# Altium PCB PCB5.PcbDoc
Units mil, origin at the board's own origin, x right, y up, seen from the top; angles counter-clockwise.
Board outline 5410 x 2710 mil, 2 copper layers (Top Layer, Bottom Layer); 51 components, 36 nets, 130 pads, 9 vias.
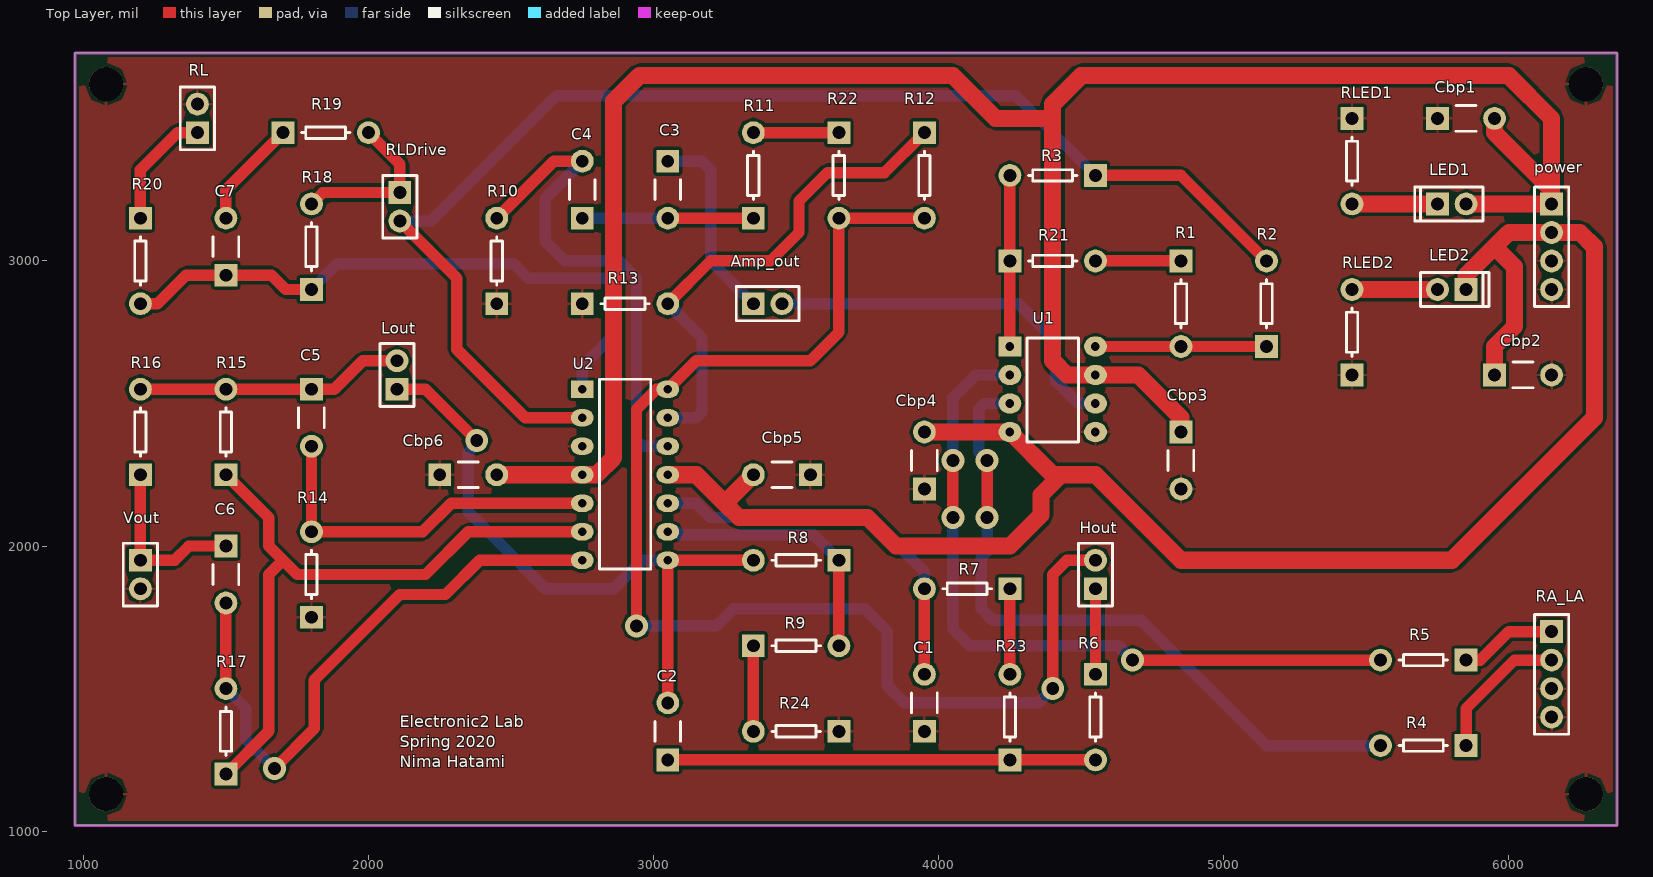
[diagram p0: Top Layer view]
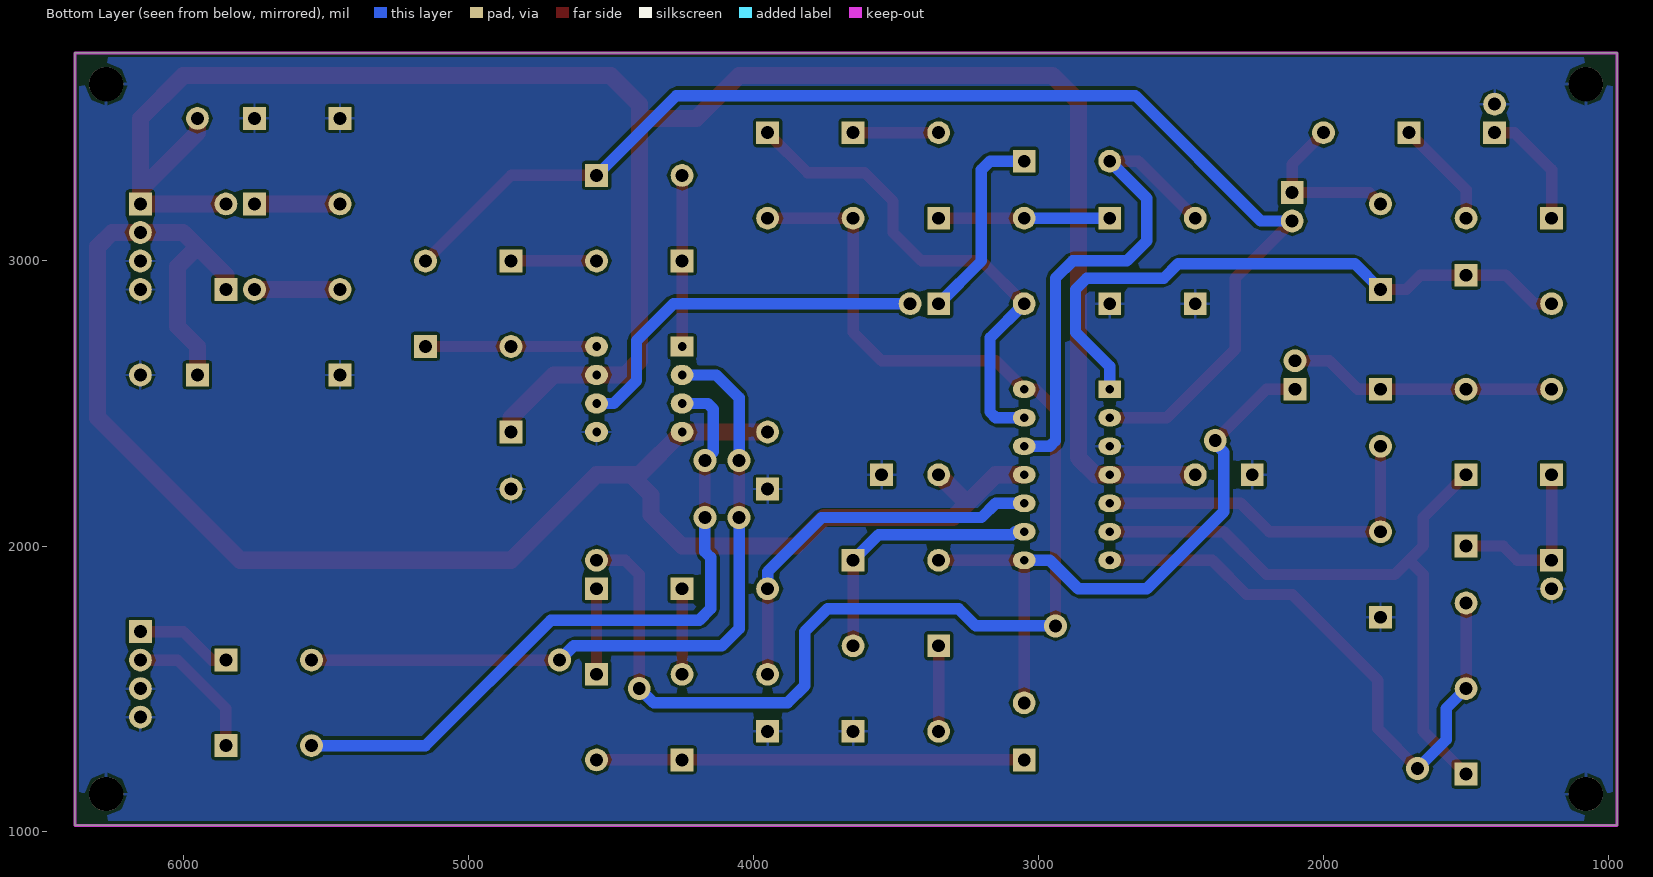
[diagram p1: Bottom Layer view, seen from below]

## Layer stack, top to bottom
Top Solder: solder mask 0.4, Solder Resist, Dk 3.5
Top Layer: signal copper 1.4
Dielectric 1: dielectric 12.6, FR-4, Dk 4.8
Bottom Layer: signal copper 1.4
Bottom Solder: solder mask 0.4, Solder Resist, Dk 3.5

## Board outline
970,1020 970,3730 6380,3730 6380,1020

## Design rules (kind name [scope] priority, off if disabled: settings)
Clearance [All] p1: gap=10 ignorepadtopadclearanceinfootprint=FALSE except(0: Arc-Hole Track-Hole SMDPad-Hole THPad-Hole Via-Hole Fill-Hole Poly-Hole Region-Hole Text-Hole)
HoleSize [All] p1: absolutevalues=TRUE maxlimit=120 minlimit=1 maxpercent=80.000 minpercent=20.000
PolygonConnect [All] p1: connectstyle=Relief reliefconductorwidth=10 reliefentries=4 polygonreliefangle="90 Angle" airgapwidth=10
RoutingVias [All] p1: holewidth=28 width=50 viastyle="Through Hole" minholewidth=28 minwidth=50 maxholewidth=45 maxwidth=80
SolderMaskExpansion [All] p1: expansion=4 istentingtop=FALSE
Width [All] p1: maxlimit=60 minlimit=10 preferedwidth=10
29 further rules are at their usual default settings.

## Components (designator, comment, footprint, x,y, rotation, side; value= is the part's Value field where it differs from the comment)
Amp_out "port" pinheader 3350,2850 r0 top
C1 "Cap" cap 3950,1350 r90 top value=15nF
C2 "Cap" cap 3050,1250 r90 top value=2.2uF
C3 "Cap" cap 3050,3350 r270 top value=2.2uF
C4 "Cap" cap 2750,3150 r90 top value=6.8uF
C5 "Cap" cap 1800,2550 r270 top value=47nF
C6 "Cap" cap 1500,2000 r270 top value=47nF
C7 "Cap" cap 1500,2950 r90 top value=100nF
Cbp1 "Cap" cap 5750,3500 r0 top value=10uF
Cbp2 "Cap" cap 5950,2600 r0 top value=10uF
Cbp3 "Cap" cap 4850,2400 r270 top value=100nF
Cbp4 "Cap" cap 3950,2200 r90 top value=100nF
Cbp5 "Cap" cap 3550,2250 r180 top value=100nF
Cbp6 "Cap" cap 2250,2250 r0 top value=100nF
Hout "port" pinheader 4550,1850 r90 top
LED1 "LED1" LED1 5750,3200 r90 top
LED2 "LED1" LED1 5850,2900 r270 top
Lout "port" pinheader 2100,2550 r90 top
power "pin4" PINHEADER4 6150,3200 r0 top
R1 "Res Semi" res 4850,3000 r270 top value=12k
R2 "Res Semi" res 5150,2700 r90 top value=22k
R3 "Res Semi" res 4550,3300 r180 top value=22k
R4 "Res Semi" res 5850,1300 r180 top value=220k
R5 "Res Semi" res 5850,1600 r180 top value=220k
R6 "Res Semi" res 4550,1550 r270 top value=180k
R7 "Res Semi" res 4250,1850 r180 top value=220k
R8 "Res Semi" res 3650,1950 r180 top value=270k
R9 "Res Semi" res 3350,1650 r0 top value=22k
R10 "Res Semi" res 2450,2850 r90 top value=1.8Meg
R11 "Res Semi" res 3350,3150 r90 top value=4.7Meg
R12 "Res Semi" res 3950,3450 r270 top value=100k
R13 "Res Semi" res 2750,2850 r0 top value=10k
R14 "Res Semi" res 1800,1750 r90 top value=68k
R15 "Res Semi" res 1500,2250 r90 top value=10k
R16 "Res Semi" res 1200,2250 r90 top value=68k
R17 "Res Semi" res 1500,1200 r90 top value=10k
R18 "Res Semi" res 1800,2900 r90 top value=1Meg
R19 "Res Semi" res 1700,3450 r0 top value=10k
R20 "Res Semi" res 1200,3150 r270 top value=220k
R21 "Res Semi" res 4250,3000 r0 top value=2.7k
R22 "Res Semi" res 3650,3450 r270 top value=680k
R23 "Res Semi" res 4250,1250 r90 top value=10k
R24 "Res Semi" res 3650,1350 r180 top value=33
RA_LA "pin4" PINHEADER4 6150,1700 r0 top
RL "port" pinheader 1400,3450 r90 top
RLDrive "port" pinheader 2110,3240 r270 top
RLED1 "Res Semi" res 5450,3500 r270 top
RLED2 "Res Semi" res 5450,2600 r90 top
U1 "AD620" AD620 4250,2700 r0 top
U2 "TL084" TL084 2750,2550 r0 top
Vout "port" pinheader 1200,1950 r270 top

## Footprints (in the part's own frame and the unit in brackets; to place one, negate y for a bottom-side part, rotate by r counter-clockwise, add the part's x,y. Pads: shape width x height; smd on the part's side, far side on the other; paste and mask are expansions set on the pad)
AD620 [mil]
  rect 80x70 hole 30: 1(0,0)
  oval 80x70 hole 30: 2(0,-100) 3(0,-200) 4(0,-300) 5(300,-300) 6(300,-200) 7(300,-100) 8(300,0)
  round 30 on Top Overlay: 9(90,5)
  silkscreen extent 60,-335 240,30
cap [mil]
  rect 80x80 hole 45: 1(0,0)
  round 80 hole 45: 2(200,0)
  silkscreen extent 65,-45 135,45
LED1 [mil]
  rect 80x80 hole 45: 1(0,0)
  round 80 hole 45: 2(0,-100)
  silkscreen extent -60,-160 60,80
pinheader [mil]
  rect 80x80 hole 45: 1(0,0)
  round 80 hole 45: 2(100,0)
  silkscreen extent -60,-60 160,60
PINHEADER4 [mil]
  rect 80x80 hole 45: 1(0,0)
  round 80 hole 45: 2(0,-100) 3(0,-200) 4(0,-300)
  silkscreen extent -60,-360 60,60
res [mil]
  rect 80x80 hole 45: 1(0,0)
  round 80 hole 45: 2(300,0)
  silkscreen extent 65,-20 235,20
TL084 [mil]
  rect 80x60 hole 30: 1(0,0)
  oval 80x60 hole 30: 2(0,-100) 3(0,-200) 4(0,-300) 5(0,-400) 6(0,-500) 7(0,-600) 8(300,-600) 9(300,-500) 10(300,-400) 11(300,-300) 12(300,-200) 13(300,-100) 14(300,0)
  round 30 on Top Overlay: 15(95,0)
  silkscreen extent 60,-630 240,35

## Part data
C1 C2 C3 C4 C5 C6 C7 Cbp1 Cbp2 Cbp3 Cbp4 Cbp5 Cbp6: "Capacitor", LatestRevisionDate=17-Jul-2002, LatestRevisionNote="Re-released for DXP Platform.", PackageDescription="Radial Cap, Thru-Hole; 2 Leads; 0.3 in Pin Spacing", PackageReference=RAD-0.3, Published=8-Jun-2000, Publisher="Altium Limited"
R1 R2 R3 R4 R5 R6 R7 R8 R9 R10 R11 R12 R13 R14 R15 R16 R17 R18 R19 R20 R21 R22 R23 R24 RLED1 RLED2: "Semiconductor Resistor", LatestRevisionDate=17-Jul-2002, LatestRevisionNote="Re-released for DXP Platform.", PackageDescription="Axial Device, Thru-Hole; 2 Leads; 0.5 in Pin Spacing", PackageReference=AXIAL-0.5, Published=8-Jun-2000, Publisher="Altium Limited"

## Free pads (board coordinates)
  round 120 hole 120: 1(6270,3620) 2(6270,1130) 3(1080,1130) 4(1080,3620)

## Via types
v1: diameter 80, hole 45, Top Layer to Bottom Layer, 9 vias

## Nets (pads, with @x,y where several pads share a name; then routed paths per layer and width w, separated by ;. In a path a pad name is that pad's centre, name@x,y a point inside that pad or via, vN(x,y) a via of type N, cw(c..) or ccw(c..) an arc to the next point about the centre after c; other vN are vias at no path point)
GND: C1.1 Cbp1.1 Cbp2.2 Cbp3.2 Cbp4.1 Cbp5.1 Cbp6.1 pad.1 pad.2 pad.3 pad.4 power.3 power.4 R10.1 R13.1 R14.1 R24.1 RA_LA.3 RA_LA.4 RL.2 RLED1.1 RLED2.1 U1.5 U2.3 Vout.2
LeftA: R4.1 RA_LA.2 | length 500.4
  Top Layer w40: R4.1 5850,1430 6020,1600 RA_LA.2
NetAmp_out_1: Amp_out.1 C3.1 | length 694.6
  Bottom Layer w40: C3.1 3170,3350 3200,3320 3200,3000 Amp_out.1
NetAmp_out_2: Amp_out.2 U1.6 | length 1327
  Bottom Layer w40: Amp_out.2 4280,2850 4410,2720 4410,2580 4490,2500 U1.6
NetC1_2: C1.2 R7.2 U2.10 | length 1359.4
  Top Layer w40: C1.2 R7.2
  Bottom Layer w40: U2.10 3150,2150 3200,2100 3760,2100 3950,1910 R7.2
NetC2_1: C2.1 R6.2 R23.1 | length 1500
  Top Layer w40: C2.1 R23.1 R6.2
NetC2_2: C2.2 Lout.1 R8.2 U2.8 | length 2270.2
  Top Layer w40: Lout.1 2200,2550 v1(2380,2370) ; C2.2 U2.8 R8.2
  Bottom Layer w40: v1(2380,2370) 2380,2360 2350,2330 2350,2120 2620,1850 2860,1850 2960,1950 U2.8
NetC3_2: C3.2 C4.1 R11.1 | length 600
  Top Layer w40: C3.2 R11.1
  Bottom Layer w40: C4.1 C3.2
NetC4_2: C4.2 R10.2 U2.12 | length 1778.8
  Top Layer w40: R10.2 2650,3350 C4.2
  Bottom Layer w40: C4.2 2620,3220 2620,3070 2690,3000 2880,3000 2940,2940 2940,2370 2960,2350 U2.12
NetC5_1: C5.1 Lout.2 R15.2 R16.2 | length 941.4
  Top Layer w40: R16.2 R15.2 C5.1 1880,2550 1980,2650 Lout.2
NetC5_2: C5.2 R14.2 U2.5 | length 1291.4
  Top Layer w40: C5.2 R14.2 2190,2050 2290,2150 U2.5
NetC6_2: C6.2 R17.2 U2.7 | length 2132.4
  Top Layer w40: R17.2 C6.2 ; v1(1670,1220) 1810,1360 1810,1530 2110,1830 2270,1830 2390,1950 U2.7
  Bottom Layer w40: R17.2 1570,1430 1570,1320 v1(1670,1220)
NetC7_1: C7.1 R18.1 R20.2 U2.1 | length 2206.4
  Top Layer w40: R20.2 1260,2850 1360,2950 C7.1 1660,2950 1710,2900 R18.1
  Bottom Layer w40: R18.1 1890,2990 2510,2990 2560,2940 2830,2940 2870,2900 2870,2750 2750,2630 U2.1
NetC7_2: C7.2 R19.1 | length 382.8
  Top Layer w40: C7.2 1500,3250 R19.1
NetHout_1: Hout.1 R6.1 | length 300
  Top Layer w40: R6.1 Hout.1
NetHout_2: Hout.2 R12.2 R22.2 U2.14 | length 4606.1
  Top Layer w40: v1(2940,1720) 2940,2480 3010,2550 U2.14 3150,2650 3550,2650 3650,2750 R22.2 R12.2 ; v1(4400,1500) 4400,1900 4450,1950 Hout.2
  Bottom Layer w40: v1(2940,1720) 3220,1720 3280,1780 3740,1780 3820,1700 3820,1510 3880,1450 4350,1450 v1(4400,1500)
NetLED1_1: LED1.1 RLED1.2 | length 300
  Top Layer w60: RLED1.2 LED1.1
NetLED2_2: LED2.2 RLED2.2 | length 300
  Top Layer w60: RLED2.2 LED2.2
NetR1_1: R1.1 R21.2 | length 300
  Top Layer w40: R21.2 R1.1
NetR1_2: R1.2 R2.1 U1.8 | length 600
  Top Layer w40: U1.8 R1.2 R2.1
NetR2_2: R2.2 R3.1 RLDrive.2 U2.2 | length 4534.8
  Top Layer w40: RLDrive.2 2310,2940 2310,2690 2550,2450 U2.2 ; R3.1 4850,3300 R2.2
  Bottom Layer w40: RLDrive.2 2220,3140 2660,3580 4270,3580 R3.1
NetR3_2: R3.2 R21.1 U1.1 | length 600
  Top Layer w40: U1.1 R21.1 R3.2
NetR4_2: R4.2 U1.3 | length 2437.8
  Top Layer w40: v1(4170,2100) v1(4170,2300)
  Bottom Layer w40: v1(4170,2100) 4170,1980 4150,1960 4150,1780 4190,1740 4710,1740 5150,1300 R4.2 ; v1(4170,2300) 4140,2330 4140,2480 4160,2500 U1.3
NetR5_2: R5.2 U1.2 | length 2588.7
  Top Layer w40: v1(4050,2100) v1(4050,2300) ; v1(4680,1600) R5.2
  Bottom Layer w40: v1(4050,2100) 4050,1710 4110,1650 4630,1650 v1(4680,1600) ; v1(4050,2300) 4050,2520 4130,2600 U1.2
NetR7_1: R7.1 R23.2 | length 300
  Top Layer w40: R23.2 R7.1
NetR8_1: R8.1 R9.2 U2.9 | length 941.4
  Top Layer w40: R9.2 R8.1
  Bottom Layer w40: U2.9 3081.25,2050 3091.25,2040 3560,2040 R8.1
NetR9_1: R9.1 R24.2 | length 300
  Top Layer w40: R24.2 R9.1
NetR11_2: R11.2 R22.1 | length 300
  Top Layer w40: R11.2 R22.1
NetR12_1: R12.1 R13.2 U2.13 | length 1771
  Top Layer w40: R13.2 3200,3000 3410,3000 3510,3100 3510,3210 3610,3310 3810,3310 R12.1
  Bottom Layer w40: U2.13 3150,2450 3170,2470 3170,2730 R13.2
NetR15_1: R15.1 R17.1 U2.6 | length 2348.5
  Top Layer w40: R17.1 1650,1350 1650,1900 1700,1950 ; R15.1 1650,2100 1650,2000 1700,1950 ; U2.6 2350,2050 2200,1900 1750,1900 1700,1950
NetR18_2: R18.2 R19.2 RLDrive.1 | length 582.1
  Top Layer w40: R18.2 1840,3240 RLDrive.1 2110,3340 R19.2
Nout: C6.1 R16.1 Vout.1 | length 620.7
  Top Layer w40: R16.1 Vout.1 1320,1950 1370,2000 C6.1
RightA: R5.1 RA_LA.1 | length 341.4
  Top Layer w40: R5.1 5900,1600 6000,1700 RA_LA.1
RightL: R20.1 RL.1 | length 423.8
  Top Layer w40: R20.1 1200,3320 1330,3450 RL.1
VCC: Cbp1.2 Cbp3.1 Cbp6.2 LED1.2 power.1 U1.7 U2.4 | length 7593.5
  Top Layer w60: Cbp6.2 U2.4 2800,2250 2860,2310 2860,3560 2950,3650 4050,3650 4200,3500 4400,3500 ; Cbp3.1 4850,2450 4700,2600 U1.7 4450,2600 4400,2650 4400,3500 ; LED1.2 power.1 6150,3250 ; Cbp1.2 5950,3450 6150,3250 ; 4400,3500 4400,3550 4500,3650 6000,3650 6150,3500 6150,3250
VEE: Cbp2.1 Cbp4.2 Cbp5.2 LED2.1 power.2 U1.4 U2.11 | length 6203.9
  Top Layer w60: U2.11 3150,2250 3250,2150 ; Cbp5.2 3250,2150 ; Cbp4.2 U1.4 4400,2250 ; LED2.1 5850,2950 5950,3050 ; Cbp2.1 5950,2700 6020,2770 6020,2980 5950,3050 ; 3250,2150 3300,2100 3750,2100 3850,2000 4250,2000 4358.75,2108.75 4358.75,2178.75 4415,2235 4400,2250 ; 4400,2250 4550,2250 4850,1950 5800,1950 6300,2450 6300,3050 6250,3100 power.2 6000,3100 5950,3050
pads on no net: U1.9 U2.15

## Polygon pours and split planes (outlines as drawn)
GND on Top Layer "Top Layer-GND" (solid, remove dead copper, pour order 0): 970,3730 6380,3730 6380,1020 970,1020
GND on Bottom Layer "Bottom Layer-GND" (solid, remove dead copper, pour order 2): 970,3730 6380,3730 6380,1020 970,1020

## Keep-outs
Keep-Out Layer:
  lines w10: 970,1020 970,2310 970,3730 6380,3730 6380,3260 6380,1020 5850,1020 1120,1020 970,1020

## Silkscreen, mask and mechanical layers (free items; w line width, h text height)
Top Overlay:
  text "Electronic2 Lab / Spring 2020 / Nima Hatami" at 2110,1210 h70